# Altium PCB RodManipulator_PCB.PcbDoc (part 2 of 2)
Units mm, origin at the board's own origin, x right, y up, seen from the top; angles counter-clockwise.
Board outline 49.23 x 28.82 mm, 2 copper layers (Top Layer, Bottom Layer); 74 components, 46 nets, 222 pads, 100 vias.
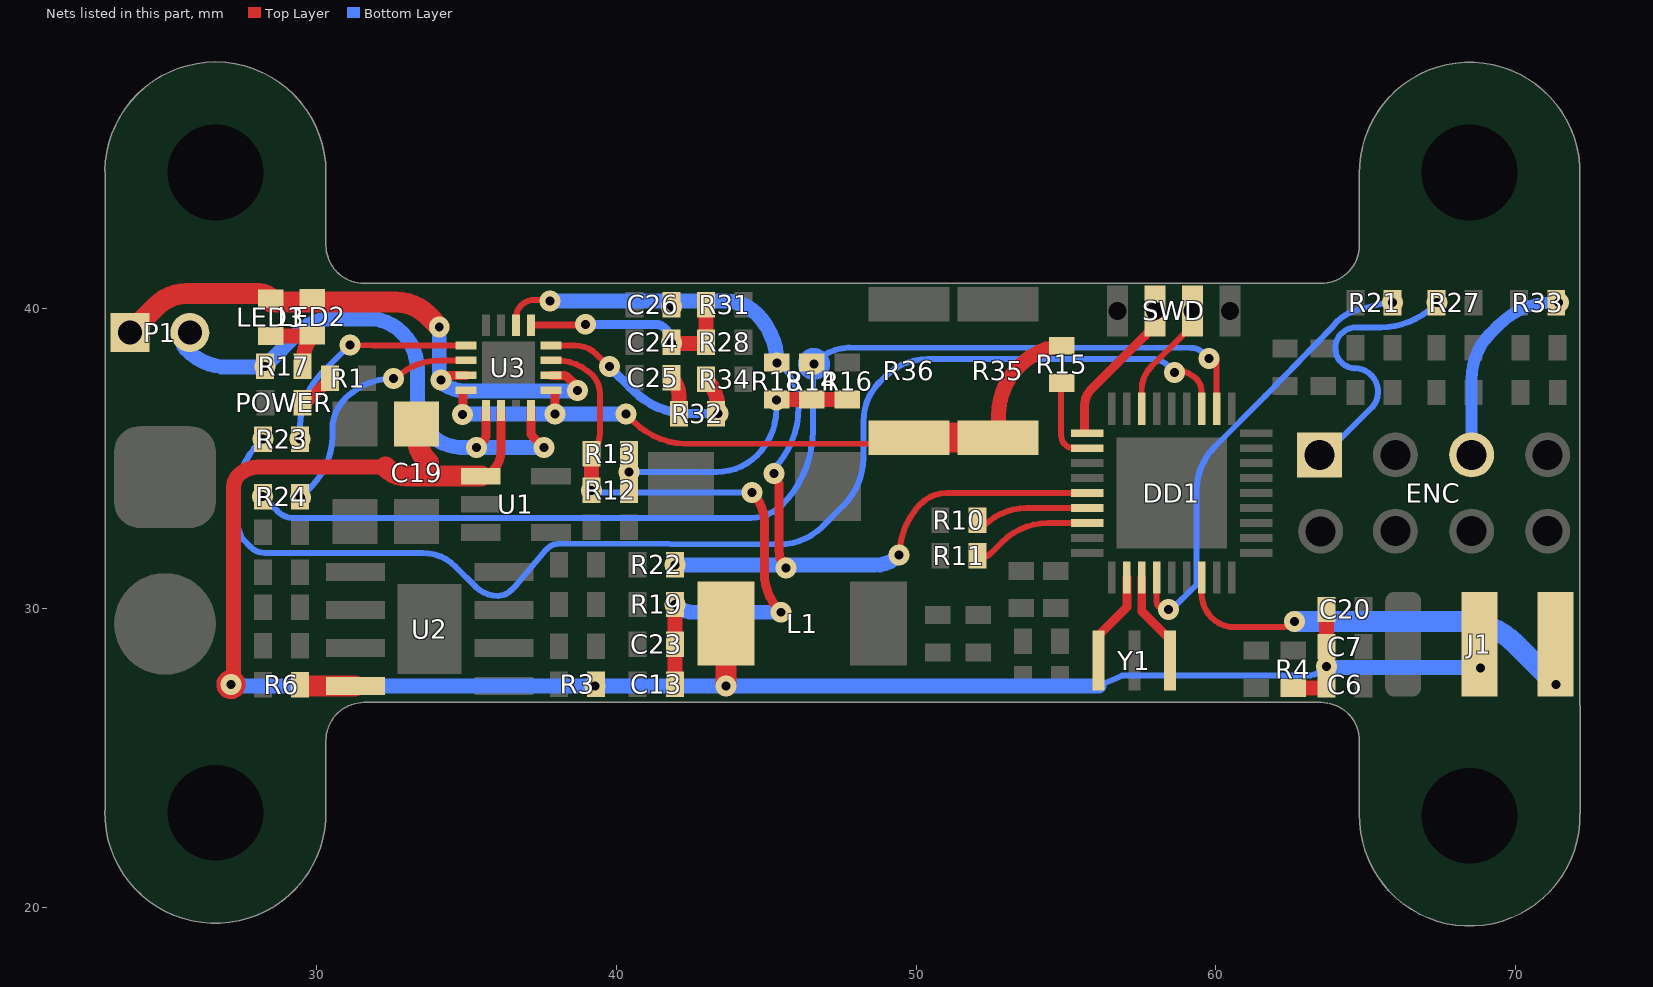
[diagram p2: the nets of this part, all layers, seen from the top]

## Via types
v1: diameter 0.7, hole 0.3, Top Layer to Bottom Layer, tented both sides, 91 vias
v2: diameter 0.7/0.7 (per signal layer), hole 0.3, Top Layer to Bottom Layer, tented both sides, 4 vias
v3: diameter 0.9/0.7 (per signal layer), hole 0.6, Top Layer to Bottom Layer, tented both sides, 3 vias
v4: diameter 0.9, hole 0.3, Top Layer to Bottom Layer, tented both sides, 1 vias
v5: diameter 0.9/0.7 (per signal layer), hole 0.3, Top Layer to Bottom Layer, tented both sides, 1 vias

## Nets (pads, with @x,y where several pads share a name; then routed paths per layer and width w, separated by ;. In a path a pad name is that pad's centre, name@x,y a point inside that pad or via, vN(x,y) a via of type N, cw(c..) or ccw(c..) an arc to the next point about the centre after c; other vN are vias at no path point) (continued)
NetC24_2: C24.2 R28.1 R31.1 U3.13 | length 9.2
  Top Layer w0.2: U3.13@37.151,39.434 cw(c37.238,39.346) 37.238,39.47 38.854,39.47 cw(c38.766,39.557) 38.766,39.434 U3.13@37.151,39.434
  Top Layer w0.3: R28.1@42.994,38.823 R28.1@42.994,38.867
  Top Layer w0.5: C24.2@41.842,38.823 R28.1@42.994,38.823 ; R28.1@42.994,38.867 R31.1@42.994,40.078
  Bottom Layer w0.2: 40.596,39.46 cw(c40.602,39.26) 40.602,39.46
  Bottom Layer w0.3: v1@38.854,39.47 41.324,39.47 cw(c41.324,39.094) 41.59,39.36 41.655,39.295 cw(c41.203,38.843) v1(41.842,38.843)
  other v1: 38.964,39.47
NetC25_1: C25.1 R32.2 | length 1.3
  Top Layer w0.5: C25.1@41.842,37.686 cw(c41.258,37.102) 42.084,37.102 R32.2@42.084,36.48
NetDD1_2: DD1.2 Y1.1 | length 2.3
  Top Layer w0.3: Y1.1@56.124,29.121 57.03,30.028 DD1.2@57.03,31.021
NetDD1_3: DD1.3 Y1.3 | length 2.3
  Top Layer w0.3: DD1.3@57.53,31.021 57.53,29.89 Y1.3@58.35,29.07
NetDD1_29: DD1.29 R15.2 | length 2.9
  Top Layer w0.2: R15.2@54.842,37.301 54.842,35.757 ccw(c55.266,35.757) 54.966,35.457 ccw(c55.259,35.751) 55.259,35.336 DD1.29@55.715,35.336 ; R15.2@54.86,37.301 R15.2@54.86,37.509
NetDD1_33: DD1.33 R10.2 | length 3.8
  Top Layer w0.2: R10.2@52.051,32.831 52.259,32.745 cw(c53.687,31.317) 53.687,33.336 DD1.33@55.715,33.336
NetDD1_34: DD1.34 R11.2 | length 4
  Top Layer w0.2: R11.2@52.051,31.649 ccw(c52.051,32.287) 52.502,31.836 52.868,32.202 cw(c54.399,30.671) 54.399,32.836 DD1.34@55.715,32.836
NetLED1_1: POWER.1 R1.1 | length 1.5
  Top Layer w0.2: POWER.1@29.53,36.853 POWER.1@29.747,36.853
  Top Layer w0.4: POWER.1@29.53,36.853 29.654,36.853 30.44,37.639 R1.1@30.44,37.674
NetLED2_2: LED2.2 LED3.1 R17.2 | length 2.5
  Top Layer w0.5: LED3.1@28.469,39.084 29.808,39.084 ccw(c29.808,39.14) LED2.2@29.848,39.101 ; R17.2@29.522,38.064 R17.2@29.522,38.315 ; R17.2@29.56,38.315 cw(c30.672,38.315) LED2.2@29.886,39.101
NetP2_1: ENC.1 R27.1 | length 9.2
  Bottom Layer w0.2: ENC.1@63.454,35.109 ccw(c63.454,35.52) 63.745,35.229 65.226,36.71 ccw(c64.63,37.22) 64.634,38.003 ; 64.634,38.001 cw(c64.667,38.678) 64.188,39.157 cw(c64.703,38.642) 64.703,39.37 65.507,39.37 ccw(c65.507,41.91) 66.427,39.542 ccw(c65.507,41.91) 67.303,40.114 v1(67.382,40.193)
NetP2_5: ENC.5 R33.1 | length 6.8
  Bottom Layer w0.4: ENC.5@68.534,35.109 68.534,37.635 cw(c70.705,37.635) 69.17,39.17 69.449,39.449 cw(c71.245,37.653) 71.245,40.193 v1(71.44,40.193)
NetR6_2: R6.2 U2.4 | length 1.9
  Top Layer w0.5: R6.2@29.452,27.445 R6.2@29.494,27.403 ; U2.4@31.287,27.403 U2.4@31.295,27.395
  Top Layer w0.7: R6.2@29.494,27.403 U2.4@31.287,27.403
NetR12_1: R12.1 R13.1 R14.1 R16.1 R18.1 | length 8.8
  Top Layer w0.5: R18.1@45.35,36.953 R14.1@46.525,36.953 R16.1@47.7,36.953
  Bottom Layer w0.2: v1(40.416,34.54) 43.343,34.54 ccw(c43.343,36.468) 44.706,35.105 ccw(c43.187,36.624) 45.335,36.624 v1(45.335,36.94) ; v1@45.335,37.04 v1@45.365,37.04
NetR23_1: R23.1 U3.1 | length 7.6
  Top Layer w0.2: v1(31.112,38.781) 31.857,38.763 ccw(c31.862,38.963) 31.862,38.763 U3.1@34.98,38.763
  Top Layer w0.3: v1(29.449,35.638) R23.1@29.452,35.63
  Bottom Layer w0.2: v1(29.449,35.638) 29.449,36.071 cw(c31.989,36.071) 30.192,37.866 cw(c31.989,36.071) 30.194,37.868 v1(31.112,38.781)
NetR24_1: R24.1 U3.2 | length 8
  Top Layer w0.2: v1@32.639,37.661 cw(c34.092,36.208) 34.092,38.263 U3.2@34.98,38.263
  Bottom Layer w0.2: v1(29.46,33.693) 29.817,34.05 ccw(c28.115,35.752) 30.522,35.752 30.522,35.951 cw(c32,35.951) 30.955,36.996 cw(c32.561,35.39) 32.561,37.661 v1(32.563,37.661)
NetR32_1: R32.1 R34.1 U3.12 | length 7.6
  Top Layer w0.2: U3.12@37.822,38.763 38.621,38.763 cw(c38.621,37.757) 39.333,38.469 v2(39.77,38.058)
  Top Layer w0.5: R34.1@42.994,37.638 cw(c42.038,36.682) 43.39,36.682 v1(43.39,36.493)
  Bottom Layer w0.3: v2(39.77,38.058) 40.591,37.237 ccw(c42.387,39.033) 40.931,36.952 ccw(c42.387,39.033) 42.387,36.493 v1(43.39,36.493)
NRST: DD1.4 R21.2 | length 15.3
  Top Layer w0.2: DD1.4@58.03,31.021 58.03,30.212 ccw(c58.269,30.212) 58.1,30.043 58.102,30.041 58.326,30.041 v1(58.422,29.946)
  Bottom Layer w0.2: v1(58.422,29.946) 58.521,29.946 59.356,30.781 59.356,31.732 59.356,33.9 cw(c61.463,33.9) 59.973,35.39 cw(c61.463,33.9) 59.974,35.391 61.649,37.076 ccw(c60.714,38.005) 61.66,37.086 63.915,39.409 cw(c65.092,38.528) 64.733,39.953 65.84,40.232 v1(65.904,40.193)
OUT1: LED2.1 LED3.2 P1.1 U3.3 U3.10 | length 19.7
  Top Layer w0.3: v1@34.09,37.604 34.249,37.763 U3.3@34.98,37.763 ; U3.10@37.822,37.763 38.196,37.763 cw(c38.196,37.463) 38.407,37.676 38.563,37.52 38.61,37.472 cw(c38.398,37.26) 38.695,37.302 v1@38.695,37.243
  Top Layer w0.7: P1.1@23.768,39.193 24.645,40.07 cw(c25.659,39.055) 25.659,40.49 28.08,40.49 cw(c28.08,39.94) LED3.2@28.469,40.329 ; LED3.2@28.469,40.208 32.638,40.208 cw(c32.638,38.695) 33.708,39.765 v1(34.09,39.383)
  Bottom Layer w0.5: v1@34.09,39.343 34.09,37.604 ccw(c34.962,38.476) 34.962,37.243 v1@38.696,37.243
  other v1: 38.709,37.255 34.15,37.608
OUT2: P1.2 R17.1 U3.5 U3.8 | length 19.6
  Top Layer w0.3: v1@35.33,35.463 ccw(c35.33,35.784) 35.651,35.784 U3.5@35.651,36.592 ; U3.8@37.151,36.592 37.151,35.855 ccw(c37.316,35.855) 37.199,35.739 v1@37.589,35.348
  Top Layer w0.5: P1.2@25.76,38.893 P1.2@25.845,38.808
  Bottom Layer w0.5: P1.2@25.768,39.193 26.035,39.082 25.81,39.026 25.527,38.955 ccw(c26.016,38.955) 25.67,38.609 ccw(c27.051,39.989) 27.051,38.037 28.25,38.037 v2(28.278,38.064) ; v2@28.323,38.123 29.386,39.186 cw(c30.508,38.065) 29.526,39.311 cw(c30.508,38.065) 30.508,39.651 31.951,39.651 cw(c31.65,37.959) 32.865,39.174 cw(c31.677,37.986) 33.357,37.986 33.357,36.858 ccw(c34.855,36.858) 34.806,35.362 v1(35.33,35.353) v1(37.589,35.353)
PHASE: DD1.21 R23.2 | length 42.1
  Top Layer w0.2: v1@58.552,37.937 58.643,37.937 cw(c58.643,36.933) 59.353,37.643 cw(c58.927,37.216) 59.527,37.274 cw(c58.927,37.216) 59.53,37.216 DD1.21@59.53,36.651
  Bottom Layer w0.2: v1(28.204,35.638) 28.084,35.518 ccw(c29.88,33.722) 27.34,33.722 27.34,32.955 ccw(c28.517,32.955) 27.546,32.29 27.804,32.032 ccw(c28.264,32.492) 28.264,31.841 33.527,31.841 cw(c33.527,30.276) 34.634,31.383 35.307,30.71 ccw(c36.044,31.448) 36.044,30.405 ccw(c36.044,31.009) 36.47,30.582 36.673,30.784 37.645,31.934 cw(c38.118,31.534) 38.12,32.154 ; 38.12,32.154 45.436,32.123 ccw(c45.437,34.154) 46.873,32.718 47.58,33.425 ccw(c45.978,35.027) 48.244,35.027 48.244,36.242 cw(c50.073,36.242) 48.78,37.536 48.969,37.725 cw(c50.389,36.305) 50.389,38.313 57.85,38.313 cw(c57.85,37.517) 58.413,38.08 v1(58.63,37.863)
PWM: DD1.20 R14.2 R24.2 | length 40.5
  Top Layer w0.2: R24.2@28.2,33.653 28.208,33.661 R24.2@28.208,33.672 ; v1(59.766,38.321) 60.03,38.308 DD1.20@60.03,36.651
  Bottom Layer w0.2: v1(28.2,33.723) 28.697,33.226 ccw(c29.214,33.743) 29.172,33.013 38.503,33.013 44.488,33.013 ccw(c44.488,34.488) 45.53,33.445 ccw(c43.057,35.918) 46.555,35.918 46.555,37.759 46.555,38.138 46.55,38.143 46.576,38.169 cw(c47.853,36.891) 46.87,38.407 cw(c47.853,36.891) 47.753,38.695 cw(c47.764,38.495) 47.765,38.695 59.178,38.682 cw(c59.178,38.134) 59.566,38.522 v1(59.766,38.321)
  Bottom Layer w0.3: 46.555,37.759 cw(c46.59,38.143) 46.87,38.407 cw(c46.59,38.143) 46.975,38.143 cw(c46.59,38.143) 46.555,37.759
  other v1: 46.59,38.143
REF: C13.2 C23.1 R12.2 R13.2 R19.1 U3.11 | length 21.4
  Top Layer w0.2: U3.11@37.822,38.263 38.016,38.263 cw(c38.016,36.591) 39.198,37.773 cw(c38.587,37.162) 39.451,37.162 39.451,35.839 cw(c38.477,35.839) R13.2@39.172,35.156 cw(c38.477,35.839) R13.2@39.166,35.15
  Top Layer w0.3: v1(44.53,33.853) cw(c43.547,32.87) 44.937,32.87 44.937,31.186 ccw(c46.811,31.186) v1(45.486,29.861)
  Top Layer w0.5: R13.2@39.166,35.15 39.166,33.93 v1(39.172,33.924) ; C13.2@41.952,27.453 C23.1@41.952,28.786 v1(41.952,30.12)
  Bottom Layer w0.2: v1(39.172,33.924) ccw(c39.344,34.097) 39.344,33.853 v1(44.53,33.853)
  Bottom Layer w0.5: v1(41.952,30.12) ccw(c42.577,30.744) 42.577,29.861 v1(45.486,29.861)
RST: C26.2 DD1.32 R18.2 R22.1 U3.14 | length 33.5
  Top Layer w0.2: U3.14@36.651,39.434 36.651,39.681 cw(c37.253,39.681) 37.253,40.283 37.747,40.283 v1(37.79,40.24) ; v1(45.252,34.495) cw(c44.944,34.188) v1@45.379,34.188 ; v1(49.435,31.77) 49.455,31.779 cw(c51.87,31.779) 50.163,33.486 cw(c51.007,32.642) 51.007,33.836 DD1.32@55.715,33.836
  Top Layer w0.3: v1(45.252,34.495) cw(c44.823,34.067) 45.429,34.067 45.429,31.902 ccw(c46.218,31.902) v2@45.66,31.344
  Bottom Layer w0.2: v1(45.252,34.495) 45.209,34.6 ccw(c43.099,36.709) 46.082,36.709 ccw(c44.077,36.709) 45.495,38.127 v1(45.36,38.183)
  Bottom Layer w0.5: v1(37.79,40.24) 41.842,40.24 43.664,40.24 cw(c43.664,38.799) 44.683,39.818 cw(c43.048,38.183) v1(45.36,38.183) ; v1(41.952,31.431) 48.616,31.431 ccw(c48.616,32.589) v1(49.435,31.77)
  other v1: 41.842,40.06
  other v2: 45.66,31.344
SEN: R15.1 R35.2 R36.2 U3.4 U3.9 | length 23.8
  Top Layer w0.2: v1(40.326,36.473) 40.575,36.224 ccw(c42.371,38.02) 42.251,35.483 49.513,35.483 R36.2@49.759,35.729
  Top Layer w0.3: v1@34.89,36.473 U3.4@34.89,37.24 ; v1(37.95,36.473) 37.95,37.135
  Top Layer w0.5: R35.2@52.751,35.649 52.751,36.415 cw(c55.102,36.415) R15.1@54.86,38.753
  Top Layer w1: R36.2@49.852,35.698 R35.2@52.729,35.698
  Bottom Layer w0.5: v1@34.89,36.453 34.91,36.473 v1(37.95,36.473) v1(40.326,36.473)
  other v1: 34.87,36.453
SIGNAL_IN: DD1.7 J1.3 | length 15.3
  Top Layer w0.2: DD1.7@59.53,31.021 59.53,30.488 ccw(c60.682,30.488) 59.867,29.674 ccw(c60.622,30.429) 60.622,29.361 61.93,29.361 62.166,29.361 ccw(c62.166,30.017) v1(62.63,29.553)
  Top Layer w0.3: J1.3@71.334,28.793 71.334,27.442 ccw(c71.389,27.442) 71.35,27.403 v1(71.35,27.453)
  Bottom Layer w0.7: v1(62.63,29.553) 68.198,29.553 cw(c68.198,27.013) 69.994,28.809 v1(71.35,27.453)
SWDCLK: DD1.28 SWD.2 | length 5
  Top Layer w0.2: DD1.28@55.674,35.877 DD1.28@55.715,35.836
  Top Layer w0.3: 55.623,36.772 cw(c56.35,36.772) 55.836,37.286 57.63,39.081 ccw(c56.798,39.913) SWD.2@57.975,39.913 ; DD1.28@55.624,35.877 55.624,36.772
SWDIO: DD1.25 SWD.3 | length 3.8
  Top Layer w0.2: DD1.25@57.53,36.651 57.53,37.282 cw(c58.643,37.282) 57.856,38.069 58.91,39.123 ccw(c58.151,39.883) SWD.3@59.225,39.883
VCC: C6.2 C7.1 C19.1 C20.1 J1.2 L1.1 R3.2 R4.2 U1.1 U3.6 | length 69.1
  Top Layer w0.3: U1.1@35.348,34.375 ccw(c35.348,35.139) 35.888,34.599 ccw(c35.254,35.233) 36.151,35.233 U3.6@36.151,36.592 ; v1@43.842,27.453 v1@43.845,27.453 ; v1@27.23,27.779 cw(c27.14,27.453) 27.478,27.453 cw(c27.14,27.453) v1@27.23,27.779
  Top Layer w0.5: v1(27.14,27.453) 27.23,27.543 27.23,27.779 27.23,34.047 cw(c27.776,34.047) 27.39,34.433 cw(c28.042,33.781) 28.042,34.703 32.3,34.703 ; R4.2@62.58,27.34 63.45,27.34 ccw(c63.45,27.681) C6.2@63.692,27.44 v1(63.692,28.055) C7.1@63.692,28.705 C20.1@63.692,29.953 ; J1.2@68.794,28.793 J1.2@68.826,28.608
  Top Layer w0.7: 32.3,34.703 ccw(c33.025,35.428) 33.025,34.403 35.348,34.403 U1.1@35.482,34.403 ; C19.1@33.332,36.143 33.332,35.813 ccw(c34.69,35.813) 33.73,34.853 ; v1(43.66,27.403) L1.1@43.66,29.483
  Bottom Layer w0.2: 56.099,27.403 56.878,27.745 57.28,27.745 63.013,27.745 ccw(c63.013,28.637) 63.643,28.006 v1(63.692,28.055)
  Bottom Layer w0.45: 55.598,27.403 55.606,27.412
  Bottom Layer w0.5: v1(27.14,27.453) ccw(c27.261,27.574) 27.261,27.403 v1(39.29,27.403) v1(43.66,27.403) 55.598,27.403 56.099,27.403 ; v1@63.724,28.023 v1@68.71,28.023
  other v1: 68.826,27.998
pads on no net: DD1.10 DD1.11 DD1.12 DD1.13 DD1.14 DD1.15 DD1.16 DD1.22 DD1.23 DD1.24 U1.3 U2.3

## Polygon pours and split planes (outlines as drawn)
GND on Top Layer "GND_L01_P000" (solid, remove dead copper, pour order 0): 74.2,51.43 74.2,17.47 20.07,17.47 20.07,51.43
GND on Bottom Layer "GND_L02_P001" (solid, remove dead copper, pour order 1): 74.23,51.44 74.23,17.48 20.1,17.48 20.1,51.44

## Other copper
Top Layer:
  rectangle net NetC8_1: 46.899,30.136 48.161,33.483
  rectangle net GND: 35.545,38.739 36.26,39.637
  rectangle net GND: 32.709,30.357 34.069,32.679
  rectangle net GND: 39.087,30.458 39.557,31.175
  rectangle net GND: 39.326,28.786 40.708,30.482
  rectangle net SEN: 37.6,36.458 38.17,37.263
  rectangle net SEN: 34.65,36.433 35.217,37.24
  pour cut-out: 72.013,39.706 cw(c71.972,39.666) 72.03,39.666 72.03,35.78 70.102,35.78 cw(c69.641,39.844) 67.124,36.62 cw(c69.442,34.726) 69.142,37.705 69.43,39.6 71.725,39.6 ccw(c71.725,40.007) 72.013,39.719
  pour cut-out: 64.9,40.78 64.908,40.788 cw(c67.828,40.601) 67.96,40.733 68.472,40.222 ccw(c69.104,39.59) 68.21,39.59 68.21,39 cw(c67.075,39) 67.878,38.198 66.43,36.75 cw(c66.14,37.04) 66.14,36.63 64.65,36.63 cw(c64.65,37.332) 64.154,36.835 64.021,36.969 cw(c64.24,37.188) 63.93,37.188 63.93,40.66 64.701,40.66 ccw(c64.701,40.899) 64.87,40.73
  region net GND: 34.77,30.8 34.706,30.864 cw(c36.321,32.479) 34.037,32.479 cw(c32.12,32.479) 33.476,31.123 32.709,30.357
  region net +3v3: 37.093,34.151 ccw(c38.859,32.722) 36.68,33.366 38.222,33.366 ccw(c38.222,33.618) 38.4,33.44 ccw(c38.231,33.609) 38.47,33.609 38.47,34.503 ccw(c38.334,34.503) 38.43,34.6
  region net GND: 69.485,40.007 69.147,39.669 ccw(c69.853,38.962) 68.889,38.698 68.472,40.222 68.539,40.222 68.849,40.119
  region net FAULT: 44.527,39.878 44.975,39.878 cw(c44.975,39.817) 45.019,39.86 44.536,40.344 ccw(c44.428,40.237) 44.428,40.388 44.428,39.969
  region net +3v3: 56.607,30.48 ccw(c56.607,30.182) 56.396,30.392 56.308,30.322 ccw(c56.294,30.355) 56.327,30.342 56.327,30.52 56.466,30.658
  region net FAULT: 44.428,39.969 44.519,39.878 44.636,39.878 cw(c44.181,37.574) 45.484,39.529 45.004,40.008 ccw(c44.777,39.781) 44.777,40.102
  region net VCC: 32.228,34.309 ccw(c31.523,33.455) 31.418,34.558 32.005,34.581 ccw(c32.005,34.998) 32.3,34.703 32.48,34.523 ccw(c32.507,34.55) 32.507,34.512
  region net VCC: 36.03,34.113 cw(c35.885,34.258) 35.885,34.053 35.15,34.053 cw(c35.516,34.053) 35.257,34.312 35.348,34.403 cw(c35.822,33.929) 35.822,34.599 35.99,34.599 cw(c35.99,34.544) 36.029,34.583 ccw(c35.647,34.2) 35.647,34.741 35.114,34.741 ccw(c35.114,34.222) 34.746,34.589 34.55,34.393
  region net +3v3: 55.896,30.064 55.427,29.658 ccw(c56.461,28.624) 54.999,28.624 54.999,29.767 ccw(c54.543,29.767) 54.865,30.089 cw(c54.977,29.978) 54.977,30.136 55.926,30.136
  region net NetDD1_29: 55.196,37.301 ccw(c56.109,36.467) 54.874,36.535 ccw(c53.947,36.535) 54.603,37.19 54.492,37.301
  region net REF: 38.961,35.533 ccw(c38.015,36.479) 39.353,36.479 39.353,36.504 ccw(c39.903,36.504) 39.514,36.115 ccw(c39.833,35.796) 39.382,35.796 39.382,35.337 39.122,35.337 cw(c39.122,35.474) 39.025,35.377
  region net VCC: 32.604,35.431 32.511,35.338 cw(c31.054,36.795) 31.054,34.734 33.444,34.734 ccw(c33.444,35.139) 33.73,34.853 cw(c34.69,35.813) 33.332,35.813
  region net VCC: 35.673,34.741 ccw(c34.867,35.548) 36.007,35.548 36.007,34.886 cw(c35.601,34.886) 35.888,34.599 cw(c35.849,34.638) 35.849,34.583 35.285,34.583 35.285,34.75 35.29,34.755 35.69,34.755
  region net +3v3: 64.577,40.311 cw(c62.793,40.311) 64.054,39.049 63.864,38.858 ccw(c63.925,38.92) 63.925,38.833 64.84,38.833 64.84,39.788 cw(c65.161,39.788) 64.934,40.015
  region net +3v3: 36.769,33.338 ccw(c36.713,33.301) 36.75,33.356 ccw(c34.249,34.919) 37.158,34.433 cw(c37.158,34.385) 37.192,34.419 37.46,34.151 37.158,33.848
  region net VCC: 33.956,35.64 34.637,34.842 ccw(c34.95,35.155) 34.95,34.712 34.518,34.712 cw(c34.237,36.126) 33.956,34.712 cw(c34.715,35.703) 33.634,35.078 cw(c33.801,35.482) 33.365,35.482 33.365,35.55
  region net NetC22_2: 69.269,37.421 69.607,37.759 ccw(c68.901,38.466) 69.864,38.73 70.282,37.207 70.215,37.207 69.905,37.309
  region net +3v3: 64.664,39.765 64.119,39.219 cw(c63.233,40.105) 63.233,38.852 64.441,38.852 cw(c64.441,38.104) 64.97,38.633 64.97,40.133
  region net +3v3: 37.784,31.136 ccw(c37.45,31.136) 37.686,31.372 37.364,31.694 ccw(c37.318,31.647) 37.318,31.713 37.321,31.713 ccw(c37.502,31.894) 37.502,31.778 37.795,31.778 ccw(c37.888,31.778) 37.822,31.712 38.082,31.453
  region net NetLED2_2: 29.301,38.42 29.068,38.653 ccw(c28.547,38.132) 28.547,38.869 29.492,38.869 ccw(c29.492,38.934) 29.538,38.888
  region net GND: 60.885,35.913 ccw(c60.118,36.883) 61.353,36.815 ccw(c62.28,36.815) 61.625,36.16 61.871,35.913
  region net GND: 40.463,30.482 cw(c41.728,31.747) 39.939,31.747 39.939,31.771 39.917,31.771 ccw(c39.917,31.006) 39.376,31.547 ccw(c39.497,31.426) 39.326,31.426 39.326,30.421 40.315,30.421 ccw(c40.315,30.63)
  region net GND: 56.939,35.859 56.796,35.716 cw(c56.694,35.818) 56.694,35.673 56.7,35.673 cw(c56.7,35.04) 57.148,35.488 cw(c57.433,35.773) 57.03,35.773 57.03,35.823
  region net GND: 61.896,37.488 61.335,36.927 ccw(c62.426,35.836) 60.883,35.836 61.837,35.836 cw(c63.268,35.886) 62.261,36.904 62.77,37.488
  region net GND: 66.013,30.543 66.004,30.534 64.574,30.534 ccw(c64.574,30.326) 64.427,30.473 64.427,27.174 ccw(c64.755,27.174) 64.523,26.942 64.528,26.947 ccw(c66.63,27.143) 66.768,27.004 66.837,27.073 ccw(c66.801,27.109) 66.852,27.109 66.852,30.244 ccw(c66.422,30.244) 66.726,30.548 66.458,30.548
  region net GND: 40.125,32.05 ccw(c40.471,31.704) 39.982,31.704 39.982,31.4 cw(c39.982,31.745) 39.738,31.501 39.555,31.684 39.761,31.891 ccw(c39.656,31.996) 39.805,31.996
  region net GND: 55.541,31.264 56.016,31.739 ccw(c55.892,31.864) 56.068,31.864 55.175,31.864 55.179,31.859 cw(c55.018,31.711) 55.132,31.597 55.075,31.54 ccw(c55.185,31.43) 55.029,31.43 55.029,31.299
  region net BOOT1: 63.003,36.155 62.901,36.155 ccw(c62.901,35.531) 62.46,35.972 62.368,35.88 ccw(c62.578,35.669) 62.28,35.669 62.28,36.032 cw(c62.425,36.032) 62.323,36.135 62.788,36.6 ccw(c62.793,37.077) 63.131,36.739
  region net SWDCLK: 55.186,35.893 ccw(c54.439,36.879) 55.674,36.811 ccw(c56.601,36.811) 55.945,36.156 56.208,35.893
  region net NetDD1_33: 52.33,33.353 53.22,33.353 53.162,33.295 cw(c53.06,33.398) 53.06,33.253 ccw(c53.06,32.548) 52.561,33.046 52.259,32.745 ccw(c52.089,32.915) 52.33,32.915
  region net GND: 66.657,33.976 ccw(c65.181,35.24) 67.118,35.39 ccw(c68.137,35.009) 67.439,34.174 67.637,33.976
  region net GND: 66.705,26.962 66.872,27.114 ccw(c66.733,27.253) 66.93,27.253 66.93,33.853 cw(c66.829,33.954) 66.829,33.811 66.131,33.811 ccw(c66.131,32.988) 65.549,33.57 65.199,33.22 ccw(c65.367,33.053) 65.13,33.053 65.13,30.681 ccw(c65.628,30.681) 65.276,30.328 cw(c65.146,30.198) 65.33,30.198 65.33,29.545
  region net GND: 40.41,27.359 40.41,27.424 ccw(c39.451,27.424) 40.129,28.102 ccw(c39.494,27.467) 39.494,28.365 39.492,28.365 39.492,28.807 cw(c39.871,28.807) 39.603,29.075 cw(c39.692,28.986) 39.692,29.112 40.669,29.112 40.669,27.547 ccw(c40.801,27.547) 40.708,27.453
  region net GND: 55.067,30.945 ccw(c55.067,31.319) 55.331,31.054 55.541,31.264 ccw(c55.457,31.18) 55.457,31.299 55.029,31.299
  region net SEN: 53.969,36.268 cw(c54.376,36.675) 53.801,36.675 53.801,36.963 53.704,36.963 ccw(c53.704,36.454) 53.344,36.814 ccw(c53.709,36.449) 53.193,36.449 53.193,36.032 53.461,36.032 ccw(c53.461,36.52) 53.806,36.175
  region net GND: 63.99,37.503 63.987,37.5 ccw(c64.765,37.194) 64.215,36.644 63.696,37.163 cw(c63.929,37.396) 63.6,37.396 63.711,37.396 ccw(c63.711,37.762) 63.97,37.503
  region net VCC: 62.937,27.572 63.085,27.72 ccw(c62.311,28.493) 63.405,28.493 63.692,28.493 cw(c63.692,28.446) 63.725,28.479 ccw(c63.805,28.399) 63.692,28.399 63.692,27.44 62.994,27.44 ccw(c62.994,27.171) 62.804,27.361
  region net GND: 68.066,33.653 ccw(c69.98,31.254) 66.93,31.597 66.93,33.653
  region net VCC: 43.99,27.365 44.588,28.13 42.776,28.13 cw(c42.765,28.158) 42.753,28.13 43.32,27.365
  region net NetDD1_34: 52.26,32.093 52.34,32.093 ccw(c52.34,32.814) 52.85,32.304 52.443,31.897 cw(c52.061,32.28) 52.061,31.739
  region net SEN: 53.789,36.24 53.789,36.72 cw(c56.271,36.72) 54.516,38.475 ccw(c54.325,38.284) 54.325,38.554 54.043,38.554 ccw(c54.043,38.185) 53.782,38.446 53.13,37.794 ccw(c54.045,36.879) 52.751,36.879 52.751,36.032 53.634,36.032 ccw(c53.634,36.299) 53.823,36.11
  region net GND: 56.386,39.259 56.25,39.395 ccw(c55.553,38.698) 55.553,39.684 cw(c55.827,39.684) 55.633,39.878 55.654,39.899 cw(c56.133,39.42) 56.133,40.097 56.484,40.097 ccw(c57.075,40.097) 56.657,39.679 56.676,39.66
  region net GND: 65.303,31.167 65.103,30.967 64.503,30.367 64.903,30.367 ccw(c64.903,30.556) 65.036,30.422 65.262,30.648 ccw(c65.163,30.747) 65.303,30.747 65.303,30.967
  region net NetC24_2: 42.046,39.34 42.634,39.786 ccw(c42.21,40.211) 42.81,40.211 42.81,39.225 cw(c42.612,39.225) 42.752,39.085 cw(c42.66,39.177) 42.66,39.047 41.842,39.047
  region net NetC21_2: 66.832,38.466 66.493,38.128 ccw(c67.2,37.421) 66.236,37.157 65.818,38.68 65.885,38.68 66.195,38.578
  region net GND: 50.32,30.833 52.12,30.833 ccw(c52.12,31.847) 52.837,31.13 53.13,31.423 53.131,31.422 53.131,30.833 52.327,30.029 cw(c52.239,30.117) 52.239,29.992 50.73,29.992 ccw(c50.149,29.992) 50.56,30.403 50.22,30.743
  region net +3v3: 37.158,34.124 37.158,33.848 37.46,34.151 37.173,34.151
  region net GND: 25.904,36.192 26.297,36.585 ccw(c24.501,38.381) 27.041,38.381 27.041,39.113 cw(c27.041,38.794) 27.266,39.02 27.367,38.919 ccw(c27.502,38.784) 27.311,38.784 27.311,36.796 ccw(c27.311,35.763) 26.58,36.493 26.196,36.109
  region net GND: 64.427,30.473 ccw(c64.295,30.605) 64.482,30.605 64.482,30.613 ccw(c64.482,30.749) 64.578,30.653 64.634,30.709 cw(c64.689,30.763) 64.612,30.763 64.612,35.054 cw(c64.879,35.054) 64.69,35.243 cw(c64.521,35.074) 64.76,35.074 64.76,34.361 ccw(c64.828,34.361) 64.78,34.313 64.78,34.763 ccw(c64.828,34.715) 64.76,34.715 64.76,34.703 ccw(c65.267,34.703) 64.908,34.345 65.05,34.203 ccw(c65.412,34.565) 65.412,34.053 66.091,34.053 cw(c66.091,33.227) 66.675,33.811 cw(c66.592,33.728) 66.71,33.728 66.71,31.076 cw(c65.037,31.076) 66.22,29.893
  region net EN: 45.52,38.707 44.336,38.707 44.336,38.813 cw(c44.805,38.813) 44.473,39.144 ccw(c45.418,40.089) 45.418,38.753 46.33,38.753
  region net +3v3: 56.052,31.256 55.389,30.593 cw(c54.77,31.083) 54.861,30.299 cw(c54.593,30.187) 54.861,30.076 54.95,29.986 cw(c55.039,29.898) 55.039,30.023 55.654,30.023 ccw(c55.654,30.408) 55.926,30.136 56.383,30.593 ccw(c56.317,30.658) 56.41,30.658 56.41,31.554
  region net GND: 58.95,32.352 ccw(c60.427,31.088) 58.489,30.938 ccw(c57.47,31.319) 58.168,32.154 57.97,32.352
  region net GND: 28.032,37.223 cw(c29.203,38.394) 27.547,38.394 27.547,38.578 ccw(c27.547,38.399) 27.421,38.526 27.311,38.416 27.311,36.796 28.149,36.796 ccw(c28.149,36.989) 28.286,36.853
  region net +3v3: 60.475,39.883 60.475,36.784 ccw(c60.663,36.784) 60.53,36.651 ccw(c60.144,37.037) 60.69,37.037 62.311,38.659 ccw(c63.101,36.088) 60.725,37.347 62.311,38.659 61.867,38.873 ccw(c61.53,38.536) 61.53,39.013 cw(c61.53,39.46) 61.214,39.144
Bottom Layer:
  rectangle net GND: 57.264,26.853 64.936,27.462
  region net NetC8_1: 38.395,32.731 38.338,32.707 ccw(c38.355,30.875) 37.052,32.163 36.185,31.297 35.207,32.275 ccw(c33.901,30.631) 33.859,32.731
  region net VCC: 56.858,27.842 56.856,27.843 56.5,27.843 ccw(c56.5,27.524) 56.274,27.75 cw(c55.977,28.047) 55.977,27.626 56.382,27.626 cw(c56.382,27.463) 56.498,27.578 cw(c56.66,27.416) 56.66,27.646 56.668,27.646 ccw(c56.668,27.732) 56.73,27.671 56.897,27.839
  region net VCC: 56.858,27.842 cw(c56.354,28.345) 56.354,27.633 56.03,27.633 56.11,27.153 ccw(c56.156,27.587) 56.339,27.191 ccw(c56.072,27.678) 56.514,27.341 56.667,27.494 cw(c57.038,27.124) 57.038,27.648 57.315,27.648 57.315,27.661 ccw(c57.196,27.661) 57.28,27.745
  region net GND: 36.909,29.65 cw(c36.29,30.859) 36.391,29.505 cw(c38.018,24.553) 36.929,29.65 cw(c37.031,29.662) 36.928,29.671 34.13,28.687 cw(c33.906,31.024) 32.412,29.213 32.412,29.367 ccw(c31.144,29.367) 32.041,30.263 31.08,31.224 cw(c31.297,31.441) 30.99,31.441 32.793,31.441 cw(c32.793,28.901) 34.589,30.697 35.429,29.857 ccw(c35.879,30.307) 35.879,29.67 36.928,29.67 36.939,29.661 ccw(c36.946,29.643) 36.928,29.65 36.919,29.66
  region net GND: 35.746,39.978 36.031,39.693 ccw(c37.827,41.489) 37.827,38.949 38.203,38.949 ccw(c38.203,36.923) 36.77,38.356 36.481,38.066
  region net OUT2: 26.273,39.394 26.742,38.925 ccw(c28.027,40.211) 28.027,38.393 27.626,38.393 ccw(c27.626,37.044) 26.672,37.998 ccw(c26.295,37.621) 26.295,38.154 26.043,38.154 ccw(c25.132,38.154) 25.776,38.798 25.655,38.919
  region net OUT2: 28.88,39.034 cw(c27.373,40.541) 27.373,38.41 27.071,38.41 cw(c27.071,38.183) 27.232,38.343 27.51,38.064 cw(c27.652,37.923) 27.652,38.123 28.323,38.123 ccw(c28.323,38.525) 28.607,38.241 29.067,38.701
  region net +3v3: 68.268,32.88 67.938,33.21 ccw(c66.917,32.19) 66.917,33.633 69.494,33.633 cw(c69.494,33.565) 69.542,33.613 69.311,33.382 ccw(c69.909,32.785) 69.064,32.785 68.994,32.785 ccw(c68.994,32.152) 68.547,32.6
  region net +3v3: 64.22,32.721 64.864,33.365 cw(c65.599,32.832) 65.456,33.729 64.22,33.729 ccw(c64.385,31.971) 63.023,33.095
  region net +3v3: 64.892,33.4 cw(c65.226,33.066) 65.226,33.538 65.526,33.538 ccw(c65.489,33.538) 65.515,33.564 65.369,33.711 ccw(c65.324,33.666) 65.324,33.729 64.836,33.729 ccw(c64.836,33.401) 64.604,33.633
  region net +3v3: 56.055,31.162 ccw(c47.399,30.501) 52.087,37.808 ccw(c52.022,37.77) 52.037,37.844 52.603,37.842 56.165,37.844 cw(c56.183,35.844) 57.457,37.386 ccw(c58.312,38.241) 58.312,37.032 59.408,37.032 ccw(c59.408,38.677) 60.571,37.514 58.533,35.476 ccw(c62.847,31.162) 56.746,31.162

## Silkscreen, mask and mechanical layers (free items; w line width, h text height)
Top Overlay:
  drawing of 20 lines, arcs and shapes, not listed
  text "RP3" at 47.04,40.573 h0.7 r270
  text "L/R" at 30.74,40.373 h0.7 r270
  text "^" at 43.91,35.83 h0.7
  text "^" at 42.84,35.14 h0.7
  text "-" at 31.966,34.488 h1 r180
  text "-" at 33.92,34.488 h1 r180
  text "5V" at 52.53,33.979 h1.5
  text "<D" at 64.32,33.55 h0.7
  text "<D" at 69.19,33.55 h0.7
  text "3V3" at 48.54,33.439 h1.5
  text "^" at 42.1,32.26 h0.7 r90
  text "E>" at 64.32,30.96 h0.7
  text "E>" at 69.31,30.96 h0.7
  text "0" at 55.26,28.353 h0.7
  text "1" at 55.33,27.193 h0.7
  text "^" at 65.16,25.8 h0.7
Mechanical 1:
  lines w0.2: 22.93,40.84 22.94,40.85
  lines w0.6: 22.93,23.23 ccw(c26.62,23.17) 30.31,23.23 30.31,25.58 cw(c31.58,25.58) 31.58,26.85 33.93,26.85 61.07,26.85 63.52,26.85 cw(c63.52,25.58) 64.79,25.58 64.79,23.13 ccw(c68.47,23.07) 72.15,23.13 ; 22.93,44.57 cw(c26.62,44.53) 30.31,44.53 30.31,42.108 ccw(c31.58,42.108) 31.58,40.838 61.148,40.838 63.52,40.838 ccw(c63.52,42.108) 64.79,42.108 64.79,44.47 cw(c68.47,44.53) 72.15,44.47 72.15,40.75 ; 22.94,23.23 22.94,26.95 ; 22.94,26.898 22.94,40.85 22.94,44.57 ; 72.152,26.75 72.152,40.665 ; 72.16,23.13 72.16,26.75